# Altium PCB PCB1.PcbDoc
Units mm, origin at the board's own origin, x right, y up, seen from the top; angles counter-clockwise.
Board outline 50.42 x 29.97 mm, 2 copper layers (Top Layer, Bottom Layer), stack 0.467 mm thick; 44 components, 33 nets, 200 pads, 0 vias.
Unrouted connection lines stored in the file: 6.
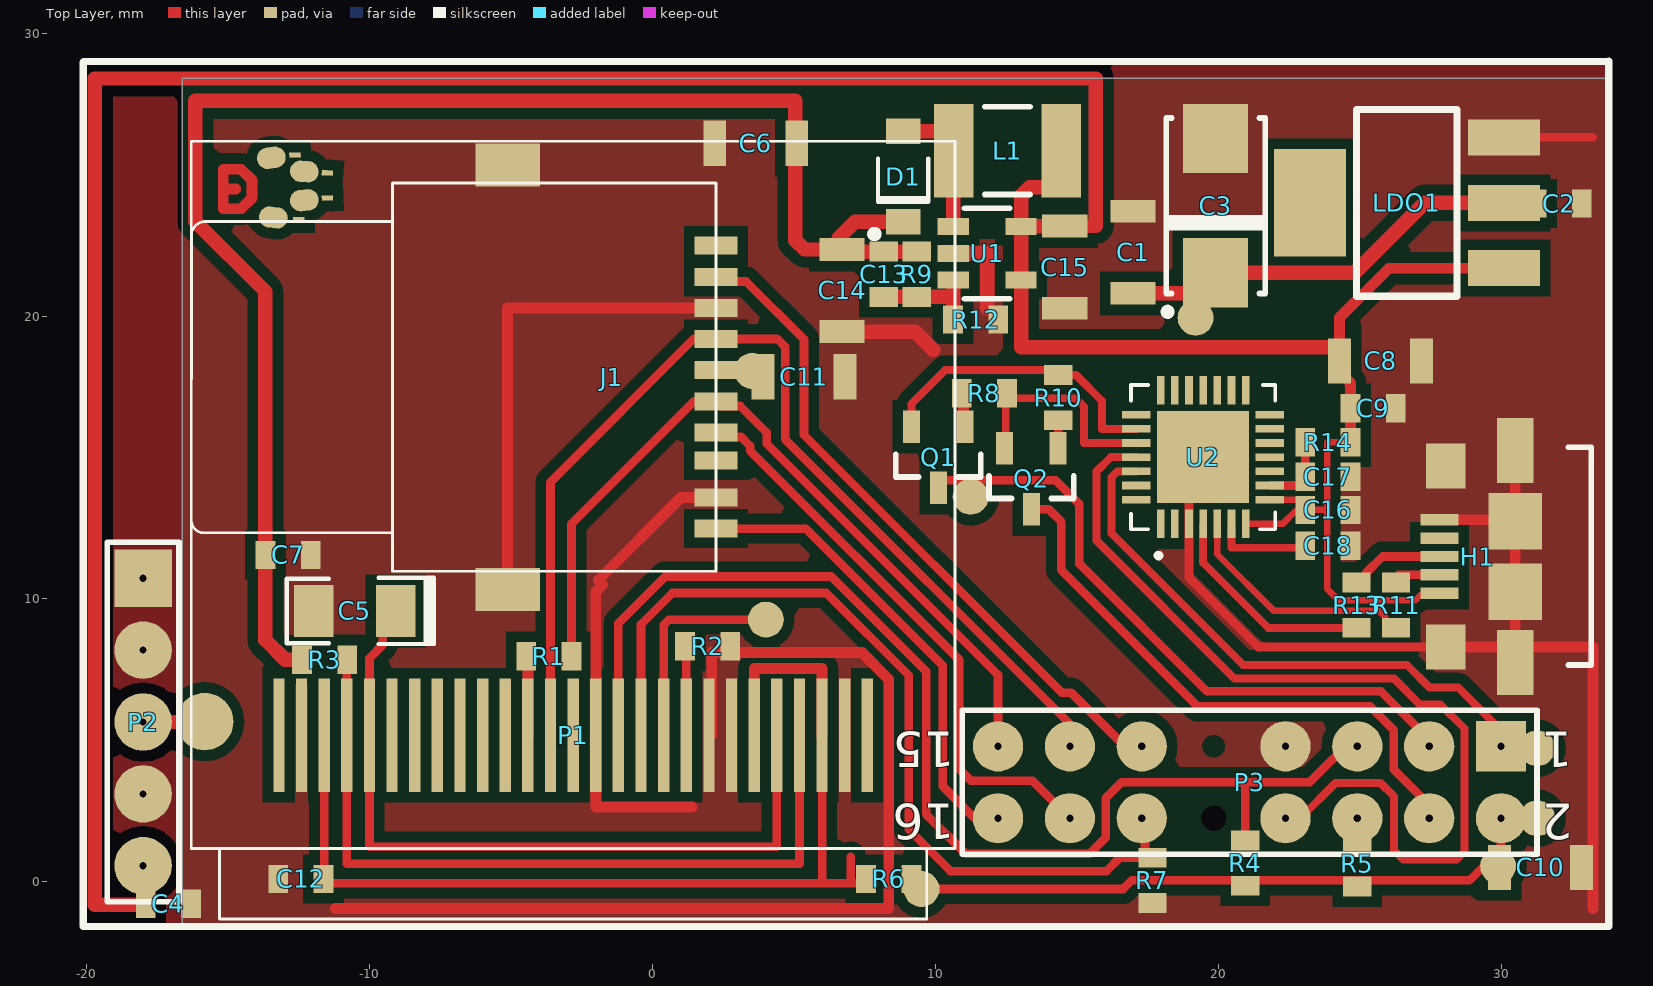
[diagram p0: Top Layer view]
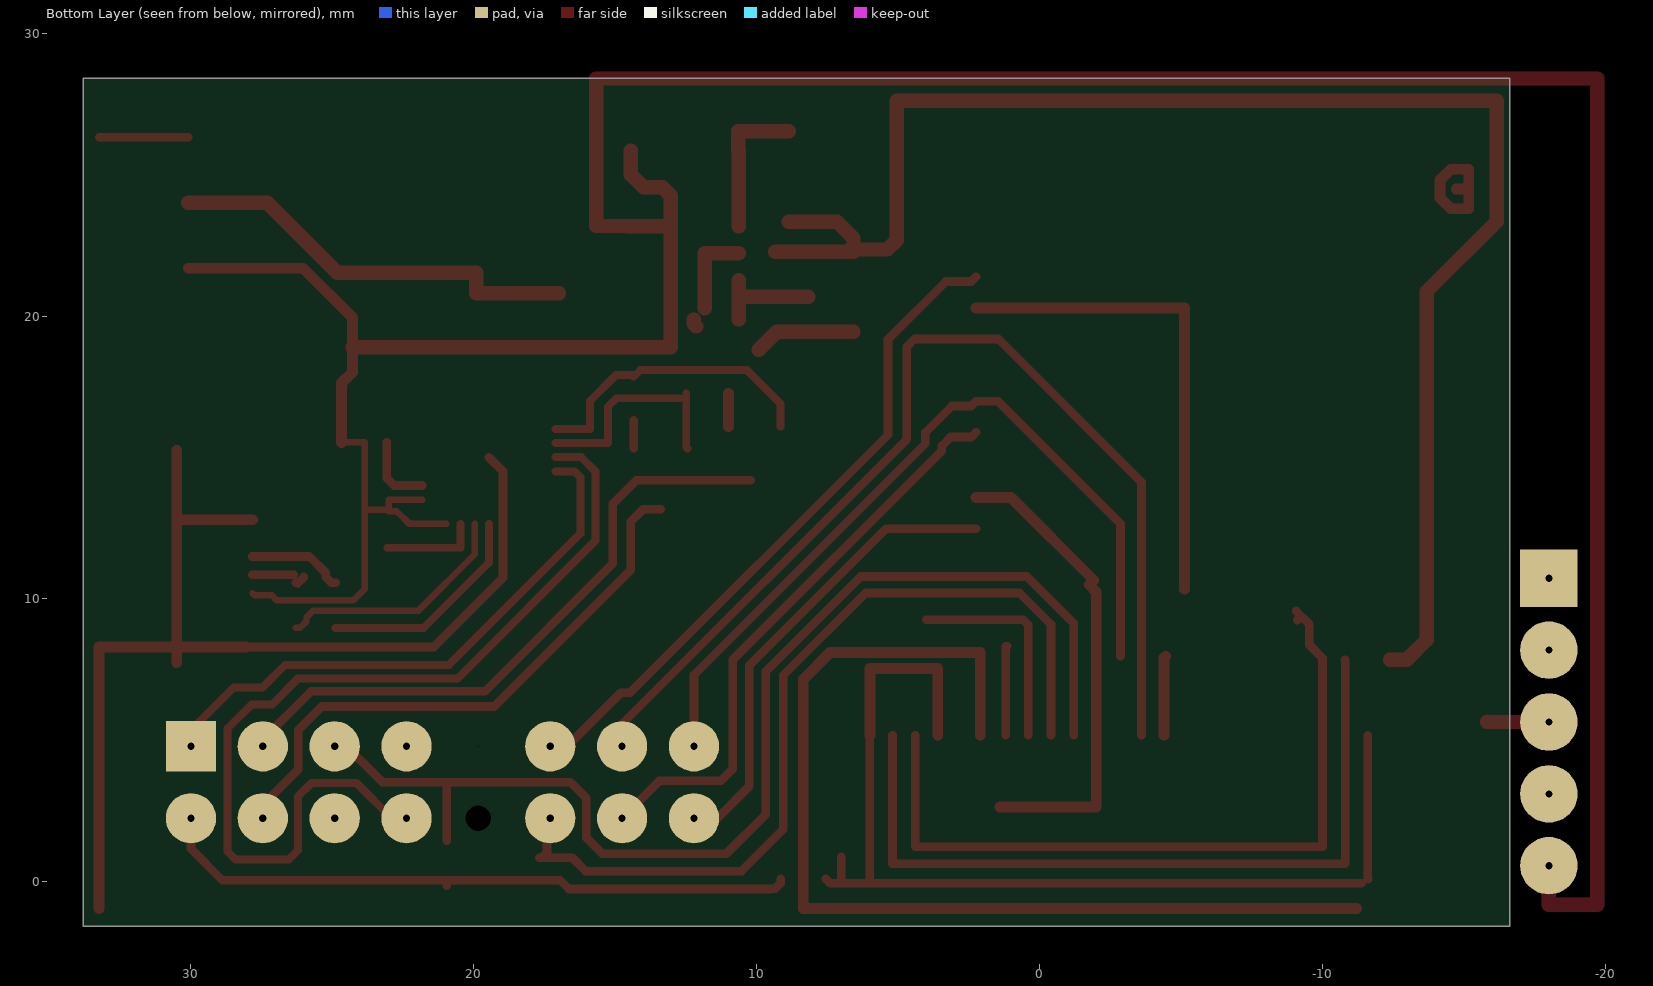
[diagram p1: Bottom Layer view, seen from below]

## Layer stack, top to bottom
Top Solder: solder mask 0.0102, Solder Resist, Dk 3.5
Top Layer: signal copper 0.0356
Dielectric 3: prepreg 0.3962, Dk 4.2
Bottom Layer: signal copper 0.0356
Bottom Solder: solder mask 0.0102, Solder Resist, Dk 3.5

## Board outline
-16.612,-1.575 -16.612,28.397 33.807,28.397 33.807,-1.575
cut-out: -52.091,51

## Design rules (kind name [scope] priority, off if disabled: settings)
Clearance [All] p1: gap=0.127 ignorepadtopadclearanceinfootprint=FALSE except(0.381: Arc-Fill Arc-Poly Arc-Region Track-Fill Track-Poly Track-Region SMDPad-Fill SMDPad-Poly SMDPad-Region THPad-Fill THPad-Poly THPad-Region Via-Fill Via-Poly Via-Region Fill-Fill Fill-Poly Fill-Region Poly-Poly Poly-Region Region-Region)
ComponentClearance [All] p1 off: gap=0.254 collisioncheckmode=3 verticalgap=0.254 showdistances=FALSE
MinimumSolderMaskSliver [All] p1: minsoldermaskwidth=0.076
PlaneConnect PlaneConnect_GND_VCC [(IsVia)] p1: planeconnectstyle=Direct reliefexpansion=0.508 reliefentries=4 reliefconductorwidth=0.254 reliefairgap=0.254
PlaneConnect [All] p2: planeconnectstyle=Relief reliefexpansion=0.508 reliefentries=4 reliefconductorwidth=0.254 reliefairgap=0.254
PolygonConnect [All] p1: connectstyle=Direct reliefconductorwidth=0.254 reliefentries=4 polygonreliefangle="90 Angle" airgapwidth=0.254
RoutingVias [All] p1: holewidth=0.254 width=0.457 viastyle="Through Hole" minholewidth=0.254 minwidth=0.457 maxholewidth=0.254 maxwidth=0.457
SilkToSilkClearance [All] p1: silktosilkclearance=0.102
SilkToSolderMaskClearance [IsPad] p1: minsilkscreentomaskgap=0.076 clearancetoexposedcopper=TRUE
SolderMaskExpansion [All] p1: expansion=0.102
Width [All] p1: maxlimit=0.635 minlimit=0.178 preferedwidth=0.178
25 further rules are at their usual default settings.

## Components (designator, comment, footprint, x,y, rotation, side; value= is the part's Value field where it differs from the comment)
C1 "4.7uF" 1206x 16.993,22.25 r90 top
C2 "0.1uF" 0603x 32.055,23.978 r0 top
C3 "220uF" CAPMP6032X260N_POL 19.914,23.901 r90 top
C4 "0.1uF" 0603x -17.107,-0.779 r180 top
C5 "4.7uF Tant" CAPC3216X160N_POL -10.516,9.576 r180 top
C6 "10uF" 1206x 3.655,26.111 r180 top
C7 "0.1uF" 0603x -12.878,11.557 r0 top
C8 "10uF" 1206x 25.741,18.415 r0 top
C9 "0.1uF" 0603x 25.476,16.739 r0 top
C10 "10uF" 1206x 31.394,0.508 r0 top
C11 "10uF" 1206x 5.359,17.856 r0 top
C12 "2.2uF" 0603x -12.421,0.102 r180 top
C13 "10pF" 0603x 8.179,21.478 r270 top
C14 "10uF" 1206x 6.706,20.904 r270 top
C15 "10uF" 1206x 14.58,21.732 r270 top
C16 "4.7uF" 0603x 23.876,13.147 r0 top value=0.1uF
C17 "0.1uF" 0603x 23.876,14.315 r0 top
C18 "4.7uF" 0603x 23.876,11.877 r0 top value=0.1uF
D1 "MBR0520-TP" SOD123 8.865,24.932 r90 top
H1 "Micro USB" 1981584-1 29.163,11.5 r90 top
J1 "0473092851" microSD_V1 2.25,17.84 r90 top
L1 "LQH43CN100K03L" 1812 12.548,25.847 r180 top value=10uH
LDO1 "3.3v" _PKG_SOT223 30.099,21.692 r180 top value=3.3V
P1 "DISPLAY" "OLED_GLASS 0.96 INCH - new" -2.8,5.582 r0 top
P2 "Header 5" HDR1X5 -18,10.73 r270 top
P3 "ESP8266" HDR2X8 30,4.79 r180 top locked
Q1 "MMBT3904-TP" SOT95P240X110-3N 10.107,15.011 r270 top
Q2 "MMBT3904-TP" SOT95P240X110-3N 13.396,14.249 r270 top
R1 "470" 0603x -3.658,7.976 r0 top
R2 "1.2M" 0603x 1.952,8.331 r180 top
R3 "470" 0603x -11.582,7.849 r0 top
R4 "10K" 0603x 20.955,0.663 r90 top
R5 "10K" 0603x 24.917,0.635 r90 top
R6 "10K" 0603x 8.357,0.102 r0 top
R7 "10K" 0603x 17.678,0.051 r270 top
R8 "10K" 0603x 11.735,17.272 r180 top
R9 "1M" 0603x 9.347,21.478 r270 top
R10 "10K" 0603x 14.351,17.12 r270 top
R11 "27R" 0603x 26.289,9.779 r270 top
R12 "95K" 0603x 11.43,19.878 r0 top
R13 "27R" 0603x 24.892,9.779 r270 top
R14 "1K" 0603x 23.876,15.534 r180 top
U1 "TPS61040DBVR" SOT95P280X144-5N 11.836,22.216 r0 top
U2 "CP2102N-A01-GQFN28" *QFN50P500X500X80-29N 19.471,15.011 r90 top

## Footprints (in the part's own frame and the unit in brackets; to place one, negate y for a bottom-side part, rotate by r counter-clockwise, add the part's x,y. Pads: shape width x height; smd on the part's side, far side on the other; paste and mask are expansions set on the pad)
0603x [mm] "Chip Resistor; Body 1.6 x 0.8 mm (LxW typ)"
  rect 0.7x1 smd: 1(-0.8,0) 2(0.8,0)
1206x [mm]
  rect 0.8x1.6 smd: 1(-1.45,0) 2(1.45,0)
1812 [mm] "Chip Capacitor, Body 4.5x3.2mm, IPC High Density"
  rect 1.4x3.3 smd: 1(-1.9,0) 2(1.9,0)
  silkscreen extent -0.8,-1.55 0.8,1.55, body extent -2.4,-1.7 2.4,1.7, height 1.4
1981584-1 [mm] "CONN RCPT MICRO USB TYPE AB"
  rect 0.4x1.35 smd: 1(-1.3,1.338) 2(-0.65,1.338) 3(0,1.338) 4(0.65,1.338) 5(1.3,1.338)
  rect 2.3x1.3 smd: 6(-3.75,-1.337) 6(3.75,-1.337)
  rect 1.6x1.4 smd: 6(-3.2,1.113) 6(3.2,1.113)
  rect 2x1.9 smd: 6(-1.25,-1.337) 6(1.25,-1.337)
  silkscreen extent -3.84,-4.02 3.86,-3.21, body extent -4.4,-4.05 4.4,1.55, height 2.75
*QFN50P500X500X80-29N [mm]
  rect 1.01x0.27 smd: 1(-2.36,1.5) 2(-2.36,1) 3(-2.36,0.5) 4(-2.36,0) 5(-2.36,-0.5) 6(-2.36,-1) 7(-2.36,-1.5) 15(2.36,-1.5) 16(2.36,-1) 17(2.36,-0.5) 18(2.36,0) 19(2.36,0.5) 20(2.36,1) 21(2.36,1.5)
  rect 0.27x1.01 smd: 8(-1.5,-2.36) 9(-1,-2.36) 10(-0.5,-2.36) 11(0,-2.36) 12(0.5,-2.36) 13(1,-2.36) 14(1.5,-2.36) 22(1.5,2.36) 23(1,2.36) 24(0.5,2.36) 25(0,2.36) 26(-0.5,2.36) 27(-1,2.36) 28(-1.5,2.36)
  rect 3.25x3.25 smd: 29(0,0)
  silkscreen extent -3.55,-2.55 2.55,2.55
_PKG_SOT223 [mil] "SOT223"
  rect 100x50 smd: 1(0,0) 2(0,-91) 3(0,-182)
  rect 100x150 smd: 4(270,-91)
  silkscreen extent 65,-221 205,39, body extent -4,-220 272,36, height 65
CAPC3216X160N_POL [mm] "Chip Capacitor, 2-Leads, Body 3.2x1.6mm, IPC Medium Density(C1206 POL)"
  rect 1.4x1.85 smd: 1(-1.45,0) 2(1.45,0)
  silkscreen extent -2.79,-1.17 2.41,1.17, body extent -1.7,-0.84 1.7,0.84, height 1.63
CAPMP6032X260N_POL [mm] "Molded Capacitor, 2-Leads, Body 6.0x3.3mm, IPC Medium Density(C6032 POL)"
  rect 2.45x2.3 smd: 1(-2.375,0) 2(2.375,0)
  silkscreen extent -3.88,-1.75 3.1,1.82, body extent -3,-1.6 3,1.6, height 2.59
HDR1X5 [mil] "Connector; Header; 5 Position"
  rect 80x80 hole 10: 1(0,0)
  round 80 hole 10: 2(100,0) 3(200,0) 4(300,0) 5(400,0)
  silkscreen extent -50,-50 450,50
HDR2X8 [mil] "Connector; Header; 8x2 Position"
  rect 70x70 hole 10: 1(0,0)
  round 70 hole 10: 2(0,100) 3(100,0) 4(100,100) 5(200,0) 6(200,100) 7(300,0) 8(300,100) 11(500,0) 12(500,100) 13(600,0) 14(600,100) 15(700,0) 16(700,100)
  round 1 hole 1: 9(400,0)
  round 7.87 hole 35.43: 10(400,100)
  silkscreen extent -50,-50 750,150
microSD_V1 [mil] "CONN MICRO SD CARD PUSH-PULL R/A"
  rect 25x60 smd: 1(-116.22,0) 2(-76.85,0) 3(-33.54,0) 4(9.77,0) 5(53.08,0) 6(96.38,0) 7(139.69,0) 8(183,0) G3(-167.4,0) G4(-210.7,0)
  rect 60x90 smd: G1(-295.28,290) G2(295.28,290)
  silkscreen extent -270,0 270,730
"OLED_GLASS 0.96 INCH - new" [mm] "OLED_GLASS 0.96 INCH"
  rect 0.4x4 smd: 1(-10.4,-0.4) 2(-9.6,-0.4) 3(-8.8,-0.4) 4(-8,-0.4) 5(-7.2,-0.4) 6(-6.4,-0.4) 7(-5.6,-0.4) 8(-4.8,-0.4) 9(-4,-0.4) 10(-3.2,-0.4) 11(-2.4,-0.4) 12(-1.6,-0.4) 13(-0.8,-0.4) 14(0,-0.4) 15(0.8,-0.4) 16(1.6,-0.4) 17(2.4,-0.4) 18(3.2,-0.4) 19(4,-0.4) 20(4.8,-0.4) 21(5.6,-0.4) 22(6.4,-0.4) 23(7.2,-0.4) 24(8,-0.4) 25(8.8,-0.4) 26(9.6,-0.4) 27(10.4,-0.4)
  silkscreen extent -13.5,-6.9 13.5,20.6
SOD123 [mil] "Molded Diode, 2-Leads, Body 2.85x1.8mm, IPC Medium Density (SOD123)"
  rect 36x48 smd: 1(-63,0) 2(63,0)
  silkscreen extent -85,-35 25,45, body extent -73,-31 73,31, height 50
SOT95P240X110-3N [mm] "SOT23, 3-Leads, Body 3.0x2.5mm (max), Pitch 0.95mm, IPC Medium Density"
  rect 1.15x0.6 smd: 1(-1.075,0.95) 2(-1.075,-0.95) 3(1.075,0)
  silkscreen extent -0.1,-1.5 0.7,1.5, body extent -1.2,-1.45 1.2,1.45, height 0.99
SOT95P280X144-5N [mm] "SOT23, 5-Leads, Body 3.1x3.0mm (max), Pitch 0.95mm, IPC Medium Density (RFMD SOT23-5)"
  rect 1.1x0.6 smd: 1(-1.2,0.95) 2(-1.2,0) 3(-1.2,-0.95) 4(1.2,-0.95) 5(1.2,0.95)
  silkscreen extent -0.8,-1.6 0.8,1.6, body extent -1.4,-1.45 1.4,1.45, height 1.45

## Part data
C1: library part CAP_1206, "CAP CER 4.7UF 16V 10% X7R 1206", Manufacturer=Samsung, PartNumber=CL31B475KOHNFNE, Vendor=Digi-Key
C2 C4 C7 C9 C16 C17 C18: library part CAP_0603, "CAP CER 0.1UF 16V 10% X7R 0603", Manufacturer=Murata, PartNumber=GRM188R71C104KA01D, Vendor=Digi-Key
C3: library part CAP_TANT_6032, "CAP TANT 220UF 6.3V 10% 2312", Manufacturer=Kemet, PartNumber=T495C227K006ATE225, Vendor=Digi-Key
C5: library part CAP_TANT_1206, "4.7µF Molded Tantalum Capacitors", Manufacturer=Kemet, PartNumber=T491A475M025AT, Vendor=Digi-Key
C6 C8 C10 C11 C14 C15: library part CAP_1206, "CAP CER 10UF 16V 10% X7R 1206", Manufacturer=Samsung, PartNumber=CL31B106KOHNNNE, Vendor=Digi-Key
C12: library part CAP_0805, "CAP CER 2.2UF 16V 10% X5R 0603", Manufacturer=Kemet, PartNumber=C0603C225K4PACTU, Vendor=Digi-Key
C13: library part CAP_0603, "10pF 50V Ceramic Capacitor C0G", Manufacturer=Kemet, PartNumber=C0603C100J5GACTU, Vendor=Digi-Key
D1: "DIODE SCHOTTKY 20V 500MA SOD123", Manufacturer=Micro, PartNumber=MBR0520-TP, Vendor=Digikey
H1: library part 1981584-1, "CONN RCPT MICRO USB TYPE AB", Manufacturer="TE Connectivity", PartNumber=1981584-1, Vendor=Digi-Key
J1: "9 (8 + 1) microSD SMT, Right Angle", Manufacturer=Molex, PartNumber=0473092851, Vendor=Digi-Key
L1: "INDUCTOR 10UH 10% 650MA 1812", Manufacturer=Murata, PartNumber=LQH43CN100K03L, Vendor=Digikey
LDO1: library part E-05-072, "IC,REG,3.3V,LDO,SOT223,RoHS", Manufacturer=Microchip, PartNumber="MIC5209-3.3YS TR", Vendor=Digi-Key
P1: library part "Header 27", "Header, 25-Pin", LatestRevisionDate=17-Jul-2002, LatestRevisionNote="Re-released for DXP Platform.", Publisher="Altium Limited"
P2: "Header, 5-Pin", LatestRevisionDate=17-Jul-2002, LatestRevisionNote="Re-released for DXP Platform.", Publisher="Altium Limited"
P3: library part "Header 8X2", "Header, 8-Pin, Dual row", LatestRevisionDate=17-Jul-2002, LatestRevisionNote="Re-released for DXP Platform.", Publisher="Altium Limited"
Q1 Q2: "TRANS NPN GP 40V SOT23", Manufacturer="Micro Commercial", PartNumber=MMBT3904-TP, Vendor=Digi-Key
R1 R3 R4 R5 R6 R7 R8 R10: library part RES_0603, "RES SMD 10K OHM 1% 1/10W 0603", Manufacturer=Panasonic, PartNumber=ERJ-3EKF1002V, Vendor=Digi-Key
R2: library part RES_0603, "RES SMD 1.2M OHM 1% 1/10W 0603", Manufacturer=Panasonic, PartNumber=ERJ-3EKF1204V, Vendor=Digi-Key
R9: library part RES_0603, "RES SMD 1M OHM 1% 1/10W 0603", Manufacturer=Panasonic, PartNumber=ERJ-3EKF1004V, Vendor=Digi-Key
R11 R13: library part RES_0603, "RES SMD 27 OHM 1% 1/10W 0603", Manufacturer=Panasonic, PartNumber=ERJ-3EKF27R0V, Vendor=Digi-Key
R12: library part RES_0603, "RES SMD 95.3K OHM 1% 1/10W 0603", Manufacturer=Yageo, PartNumber=RC0603FR-0795K3L, Vendor=Digi-Key
R14: library part RES_0603, "RES SMD 1K OHM 1% 1/10W 0603", Manufacturer=Panasonic, PartNumber=ERJ-3EKF1001V, Vendor=Digi-Key
U1: "IC LED DRVR WHITE BCKLGT SOT23-5", Manufacturer="Texas Instruments", PartNumber=TPS61040DBVR, Vendor=Digi-key
U2: "Usb-Uart Interface Bridge, Qfn-28", Package="QFN-28 Silicon Labs", Digi-Key_Part_Number=336-3694-ND, Digi-Key_Purchase_URL=https://www.digikey.com/product-detail/en/silicon-labs/CP2102N-A01-GQFN28/336-3694-ND/6012519?utm_source=snapeda&utm_medium=aggregator&utm_campaign=symbol, MF="Silicon Labs", MP=CP2102N-A01-GQFN28, SnapEDA_Link=https://www.snapeda.com/parts/CP2102N-A01-GQFN28/Silicon%20Labs/view-part/?ref=snap

## Free pads (board coordinates)
  oval 0.762x1.016 smd rot 98: 0(-13.469,25.593)
  oval 0.762x1.016 smd rot 82: 0(-13.393,23.485)
  rect 0.4x0.2 smd rot 3: 0(-12.631,25.695) 0(-11.488,24.171)
  rect 0.4x0.2 smd: 0(-12.504,23.409)
  oval 0.762x1.016 smd rot 95: 0(-12.301,24.094)
  oval 0.762x1.016 smd rot 85: 0(-12.301,25.11)
  rect 0.4x0.2 smd rot 175: 0(-11.488,25.06)
  round 2.032 smd: 2(-15.824,5.664)
  round 1.27 smd: 2(3.531,18.059) 2(4.013,9.271) 2(9.512,-0.254) 2(11.252,13.614) 2(19.202,19.939) 2(29.896,0.559) 2(31.281,2.25) 2(31.281,4.724)

## Nets (pads, with @x,y where several pads share a name; then routed paths per layer and width w, separated by ;. In a path a pad name is that pad's centre, name@x,y a point inside that pad or via, vN(x,y) a via of type N, cw(c..) or ccw(c..) an arc to the next point about the centre after c; other vN are vias at no path point)
+14V: C6.1 C7.1 C13.1 C14.1 D1.1 R3.1 R9.1 | length 55.4
  Top Layer w0.508: R3.1 -12.979,7.849 -13.678,8.547 C7.1 -13.678,20.866 -16.154,23.343 -16.154,27.61 5.055,27.61 5.055,22.682 5.385,22.352 C14.1@6.579,22.352 ; C14.1 6.703,22.352 C14.1@6.579,22.352 ; D1.1 7.163,23.332 6.579,22.748 C14.1@6.579,22.352 ; R9.1 C13.1 6.579,22.278 C14.1@6.579,22.352
CH_PD: P3.6 R5.2
DM: R11.2 U2.5 | length 8.6
  Top Layer w0.229: U2.5 19.971,11.576 21.971,9.576 25.692,9.576 25.916,9.352 25.916,9.202 26.139,8.979 R11.2
DP: R13.2 U2.4 | length 7.7
  Top Layer w0.279: U2.4 19.471,11.278 21.77,8.979 R13.2
GND: C1.2 C2.2 C3.2 C4.1 C5.2 C6.2 C7.2 C8.2 C9.2 C10.2 C11.2 C12.2 C14.2 C15.2 C16.2 C17.2 C18.2 H1.5 H1.6 J1.6 J1.G1 J1.G2 J1.G3 LDO1.3 P1.2 P1.15 P1.20 P1.21 P1.26 P2.1 P2.2 P2.4 P3.7 R2.1 R7.2 R12.2 U1.2 U2.3 U2.29 | length 120.6
  Top Layer w0.305: U2.29 18.971,14.511 U2.3 18.971,10.747 21.418,8.3 H1.6@28.05,8.3 ; LDO1.3 33.249,26.314
  Top Layer w0.381: -11.2,-0.94 8.357,-0.94 8.357,7.155 7.409,8.103 2.1,8.103 P1.20@2.1,5.182 ; J1.G1 -5.116,20.288 J1.6 ; -1.911,10.662 1.015,13.588 J1.G3 ; -1.75,10.5 -2,10.25 P1.15 -2,2.642 1.4,2.642 ; H1.5 H1.6@30.5,12.8 ; H1.6@28.05,8.3 H1.6@30.5,8.3 ; H1.6@30.5,7.75 H1.6@30.5,8.3 ; H1.6@30.5,15.25 H1.6@30.5,12.8 ; 33.249,-0.94 33.249,8.3 H1.6@30.5,8.3 ; H1.6@30.5,8.3 30.5,10.25 30.5,12.75 H1.6@30.5,12.8
  Top Layer w0.508: C14.2@6.579,19.444 9.299,19.444 9.931,18.811 ; U1.2 11.836,22.216 11.836,20.282 ; R12.2@12.134,19.632 12.23,19.728 R12.2
GPIO0: P1.18 P3.3 pad.2@4.013,9.271 pad.2@11.252,13.614 Q1.3 | length 30.1
  Top Layer w0.305: P1.18 0.4,9.081 0.59,9.271 pad.2@4.013,9.271 ; Q1.3@10.211,14.199 14.249,14.199 15.088,13.36 15.088,11.252 19.609,6.731 25.758,6.731 27.46,5.029 P3.3
GPIO2: P1.16 P3.5 R4.2 | length 42.2
  Top Layer w0.305: P1.16 -1.2,9.138 0.457,10.795 6.325,10.795 9.677,7.442 9.677,2.388 11.074,0.991 15.454,0.991 16.027,1.564 16.027,2.961 16.586,3.52 20.961,3.52 ; R4.2 20.955,2.263 20.961,2.269 20.961,3.52 ; P3.5 24.521,4.79 24.084,4.353 24.063,4.353 23.23,3.52 20.961,3.52
GPIO15: P1.17 P3.12 R7.1 | length 31.8
  Top Layer w0.305: P1.17 -0.4,9.1 0.711,10.211 6.149,10.211 9.068,7.292 9.068,1.854 10.541,0.381 16.053,0.381 16.523,0.851 R7.1@17.612,0.851 ; P3.12@17.071,2.021 P3.12 17.414,2.136 17.414,1.048 R7.1@17.612,0.851 ; R7.1 R7.1@17.612,0.851
MISO: J1.7 P3.11 | length 23.9
  Top Layer w0.305: J1.7 2.415,21.223 3.314,21.223 5.359,19.177 5.359,15.799 14.478,6.68 14.808,6.68 16.593,4.896 17.194,4.896 P3.11
MOSI: J1.3 P3.15 R1.2 | length 28.3
  Top Layer w0.305: R1.2 -2.858,12.662 1.468,16.988 J1.3 2.415,16.823 3.099,16.823 4.039,15.883 4.039,15.494 12.22,7.313 P3.15
NetC5_1: C5.1 P1.5 P1.23 | length 27.1
  Top Layer w0.305: C5.1@-9.114,9.271 C5.1@-9.1,9.257 ; C5.1 -9.529,9.112 -9.529,8.378 -10,7.907 P1.5 -10,1.245 4.4,1.245 P1.23
NetC13_2: C13.2 R9.2 R12.1 U1.3 | length 3.8
  Top Layer w0.508: C13.2 R9.2 10.63,20.678 ; R12.1 10.63,20.678 ; U1.3 10.63,21.266 10.63,20.678
NetC17_1: C17.1 R14.2 U2.9 | length 2.6
  Top Layer w0.305: U2.9 22.815,14.011 23.076,14.272 C17.1 R14.2
NetC18_1: C18.1 U2.6 | length 3.4
  Top Layer w0.279: U2.6 20.471,11.811 C18.1@23.063,11.811
NetD1_2: D1.2 L1.2 U1.1 | length 5.2
  Top Layer w0.178: L1.2@10.636,25.835 L1.2
  Top Layer w0.508: D1.2 10.648,26.532 L1.2 ; U1.1 L1.2@10.636,25.835
NetH1_2: H1.2 R11.1 | length 2.1
  Top Layer w0.178: R11.1@26.013,10.679 R11.1@26.213,10.479
  Top Layer w0.305: R11.1@26.007,10.777 26.205,10.579 R11.1 ; R11.1@26.369,10.85 H1.2
NetH1_3: H1.3 R13.1 | length 3.4
  Top Layer w0.305: R13.1 25.042,10.579 25.24,10.777 25.24,10.927 25.813,11.5 H1.3
NetP1_4: P1.4 P1.24 R3.2 | length 27.8
  Top Layer w0.305: R3.2 -10.8,7.849 P1.4 -10.8,0.635 5.2,0.635 P1.24
NetP1_12: P1.12 R1.1 | length 2.8
  Top Layer w0.381: R1.1 -4.4,7.918 P1.12
NetP1_19: P1.19 R2.2 | length 3.2
  Top Layer w0.305: R2.2 1.2,8.331 P1.19
NetQ1_1: Q1.1 R8.2 | length 1.2
  Top Layer w0.381: Q1.1@10.996,16.086 R8.2@10.996,17.272
NetQ1_2: Q1.2 R10.1 U2.28 | length 10.7
  Top Layer w0.279: Q1.2 9.157,16.897 10.348,18.088 14.119,18.088 R10.1@14.351,17.856 ; R10.1 14.973,17.92 15.9,16.993 15.9,16.011 17.111,16.011
NetQ2_1: Q2.1 R10.2 | length 1
  Top Layer w0.305: Q2.1 14.346,16.32 R10.2
NetQ2_2: Q2.2 R8.1 U2.24 | length 7.7
  Top Layer w0.279: Q2.2 12.491,15.369 R8.1@12.491,17.272 ; R8.1@12.732,17.094 14.961,17.094 15.265,16.789 15.265,15.511 U2.24
ppm: P2.3 pad.2@-15.824,5.664 | length 2.2
  Top Layer w0.508: P2.3 -15.838,5.65 pad.2@-15.824,5.664
RESET: P3.4 Q2.3 | length 20.7
  Top Layer w0.305: Q2.3 14.014,13.174 14.453,12.735 14.453,11.027 19.282,6.198 25.375,6.198 26.213,5.359 26.213,3.962 27.286,2.889 27.286,2.424 P3.4
RXD: P3.1 pad.2@31.281,4.724 U2.26 | length 20.2
  Top Layer w0.279: U2.26 16.442,14.511 16.231,14.3 16.231,12.319 20.879,7.671 26.67,7.671 27.468,6.873 28.484,6.873 30,5.357 P3.1
SCK: J1.5 P1.13 P3.13 | length 37.7
  Top Layer w0.305: P1.13 -3.6,14.129 1.459,19.188 J1.5 4.421,19.188 4.699,18.91 4.699,15.64 14.76,5.579 P3.13
SD_CARD_DET: J1.G4 P3.16 | length 16.7
  Top Layer w0.305: J1.G4 5.419,12.488 10.262,7.645 10.262,3.378 11.39,2.25 P3.16
SD_CS: J1.2 P3.14 | length 20.5
  Top Layer w0.305: J1.2 2.415,15.723 3.139,15.723 3.454,15.407 3.454,15.24 10.846,7.849 10.846,3.988 11.263,3.571 13.439,3.571 P3.14
TXD: P3.8 U2.25 | length 33.4
  Top Layer w0.279: U2.25 16.205,15.011 15.697,14.503 15.697,12.065 20.574,7.188 26.213,7.188 27.138,6.263 27.864,6.263 28.702,5.425 28.702,1.067 28.423,0.787 26.543,0.787 26.213,1.118 26.213,3.023 25.741,3.495 24.145,3.495 22.9,2.25 P3.8
VCC: C1.1 C2.1 C3.1 C10.1 C11.1 C12.1 J1.4 LDO1.2 P1.3 P1.22 P1.25 P3.2 pad.2@3.531,18.059 pad.2@9.512,-0.254 pad.2@19.202,19.939 pad.2@29.896,0.559 pad.2@31.281,2.25 R4.1 R5.1 R6.1 R6.2 | length 75
  Top Layer w0.305: C12.1 -11.6,0.122 P1.3 ; C12.1@-11.379,-0.051 6,-0.051 7.019,-0.051 ; 6,0.089 P1.25 ; 7.019,0.889 7.019,-0.051 ; R6.1 7.404,-0.051 7.019,-0.051 ; R6.2 9.157,-0.048 9.354,-0.246 9.504,-0.246 9.512,-0.254 16.637,-0.254 16.942,0.051 R4.1@20.955,0.051 ; R4.1 R4.1@20.955,0.051 ; P3.2 30,1.168 28.882,0.051 R4.1@20.955,0.051
  Top Layer w0.381: P1.22 3.6,7.544 6,7.544 P1.25
  Top Layer w0.508: C1.1 19.914,20.8 C3.1 24.828,21.526 27.305,24.003 LDO1.2
VUSB: C4.2 C8.1 C9.1 C15.1 C16.1 H1.1 L1.1 LDO1.1 P2.5 R14.1 U1.4 U1.5 U2.7 U2.8 | length 120.7
  Top Layer w0.229: U2.7 22.278,12.651 22.724,13.098 23.027,13.098 C16.1 23.851,13.147 ; U2.8 23.012,13.511 C16.1@23.012,13.147 ; R14.1 23.851,15.534 23.851,13.147 ; H1.1 27.752,10.127 27.145,10.127 26.975,9.957 24.257,9.957 23.851,10.363 23.851,13.147
  Top Layer w0.381: R14.1 24.676,17.63 24.291,18.015 C8.1 24.291,18.898 24.291,19.947 26.035,21.692 LDO1.1
  Top Layer w0.508: P2.5 -18,-0.813 -19.71,-0.813 -19.71,28.397 15.672,28.397 15.672,23.182 C15.1 14.572,23.174 13.044,23.174 U1.5 ; L1.1 14.448,24.995 14.002,24.549 13.334,24.549 13.036,24.251 U1.5 ; C8.1@24.291,18.898 13.036,18.898 U1.4 U1.5
pads on no net: H1.4 J1.1 J1.8 LDO1.4 P1.1 P1.6 P1.7 P1.8 P1.9 P1.10 P1.11 P1.14 P1.27 P3.9 P3.10 U2.1 U2.2 U2.10 U2.11 U2.12 U2.13 U2.14 U2.15 U2.16 U2.17 U2.18 U2.19 U2.20 U2.21 U2.22 U2.23 U2.27
copper on no net: | length 4.8
  Top Layer w0.381: -15.171,24.488 -14.727,24.488 ; -15.171,23.79 -15.171,25.187 -14.536,25.187 -14.155,24.806 -14.155,24.171 -14.536,23.79 -15.171,23.79

## Polygon pours and split planes (outlines as drawn)
GND on Top Layer "Top Layer-GND" (solid, remove dead copper, pour order 0): -20.168,29.007 -20.168,-1.575 33.807,-1.575 33.807,29.007

## Other copper
Top Layer:
  pour cut-out: 10.626,28.397 15.748,28.397 15.748,22.708 10.363,22.708 10.363,27.61

## Silkscreen, mask and mechanical layers (free items; w line width, h text height)
Top Overlay:
  lines w0.254: 33.807,29 -20.098,29 -20.117,28.981 -20.117,-1.575 33.807,-1.575 33.807,29.007
Mechanical 1:
  rectangle: 18.5,0.75 33.5,25.75

## Text inside footprints (layer, text, board x,y; h text height)
P3: Top Overlay "2" at 32.54,2.758 h1.27 r180; Top Overlay "1" at 32.54,5.298 h1.27 r180; Top Overlay "15" at 10.696,5.298 h1.27 r180; Top Overlay "16" at 10.696,2.758 h1.27 r180